# Altium PCB FAB_SA45_DaughterCard.PcbDoc
Units mm, origin at the board's own origin, x right, y up, seen from the top; angles counter-clockwise.
Board outline 50.8 x 50.8 mm, 4 copper layers (L01-Top Layer, L02-Inner Layer, L03-Inner Layer, L04-Bottom Layer), stack 1.571 mm thick; 44 components, 16 nets, 91 pads, 84 vias.
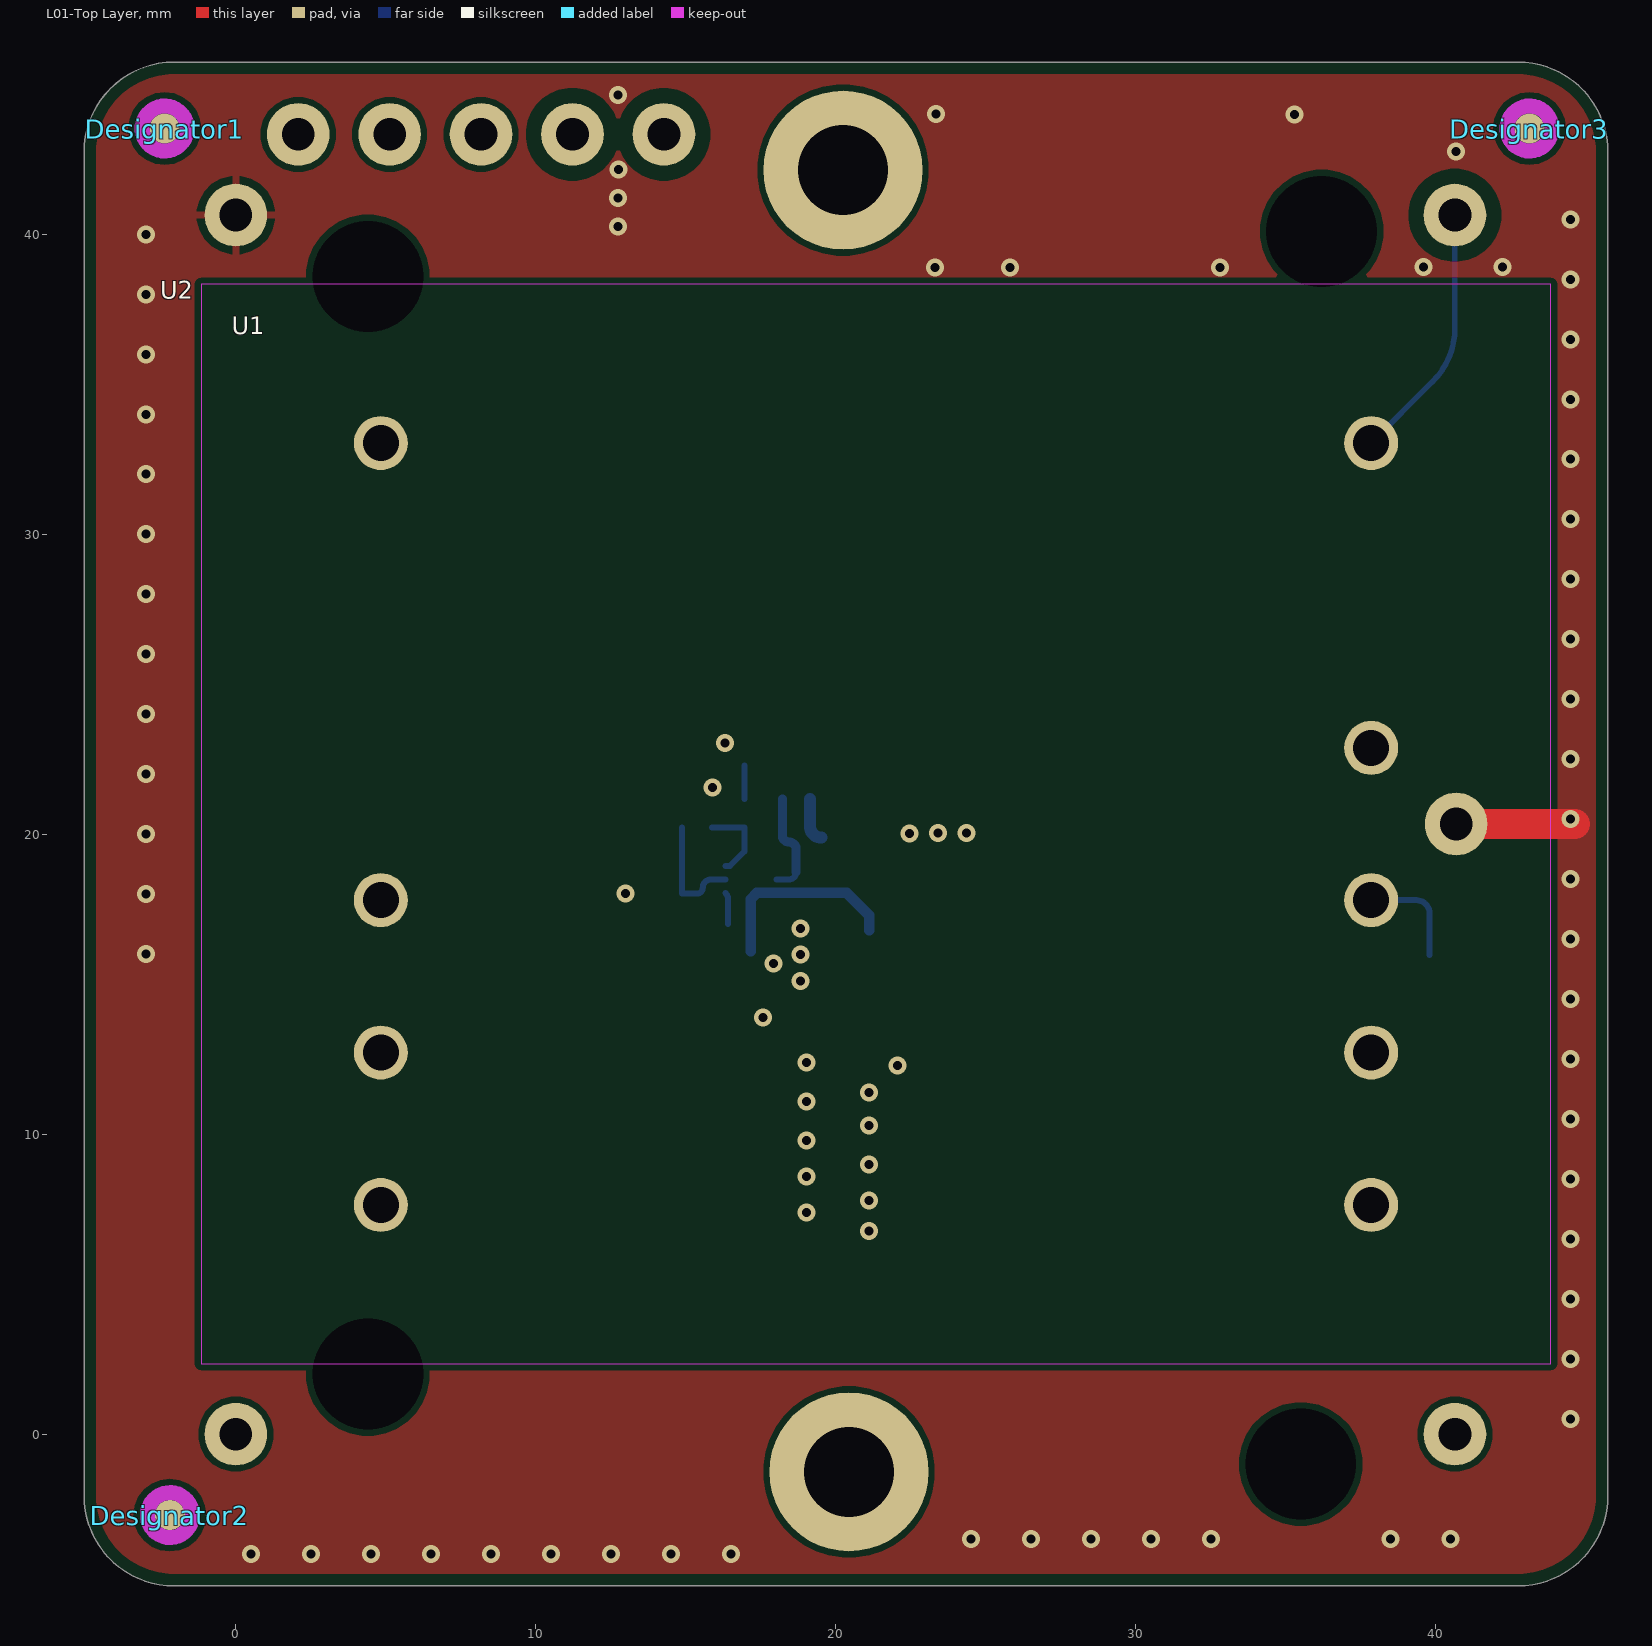
[diagram p0: L01-Top Layer view]
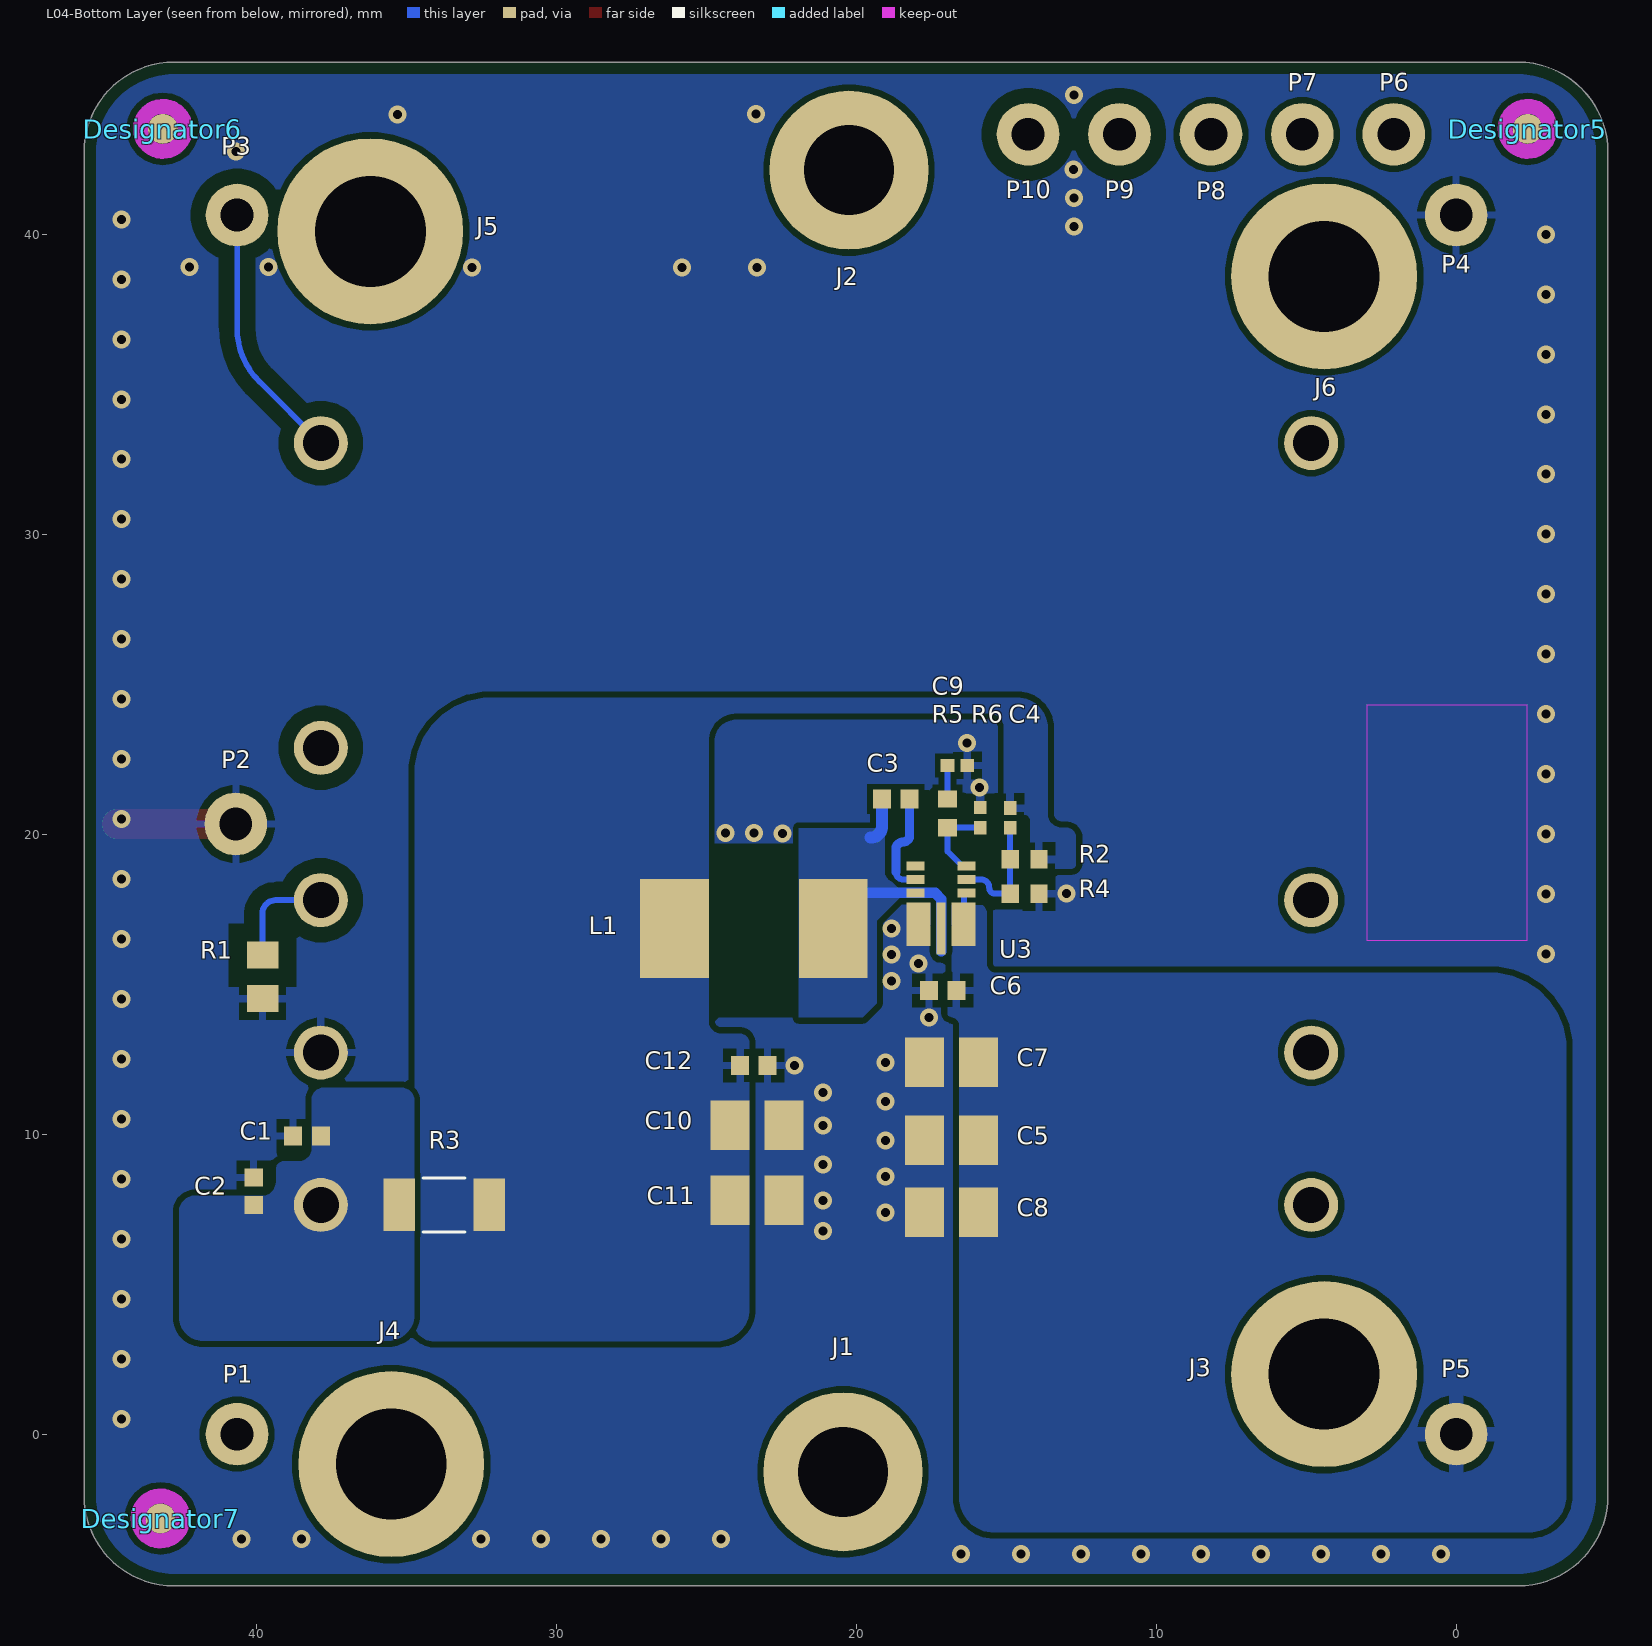
[diagram p1: L04-Bottom Layer view, seen from below]
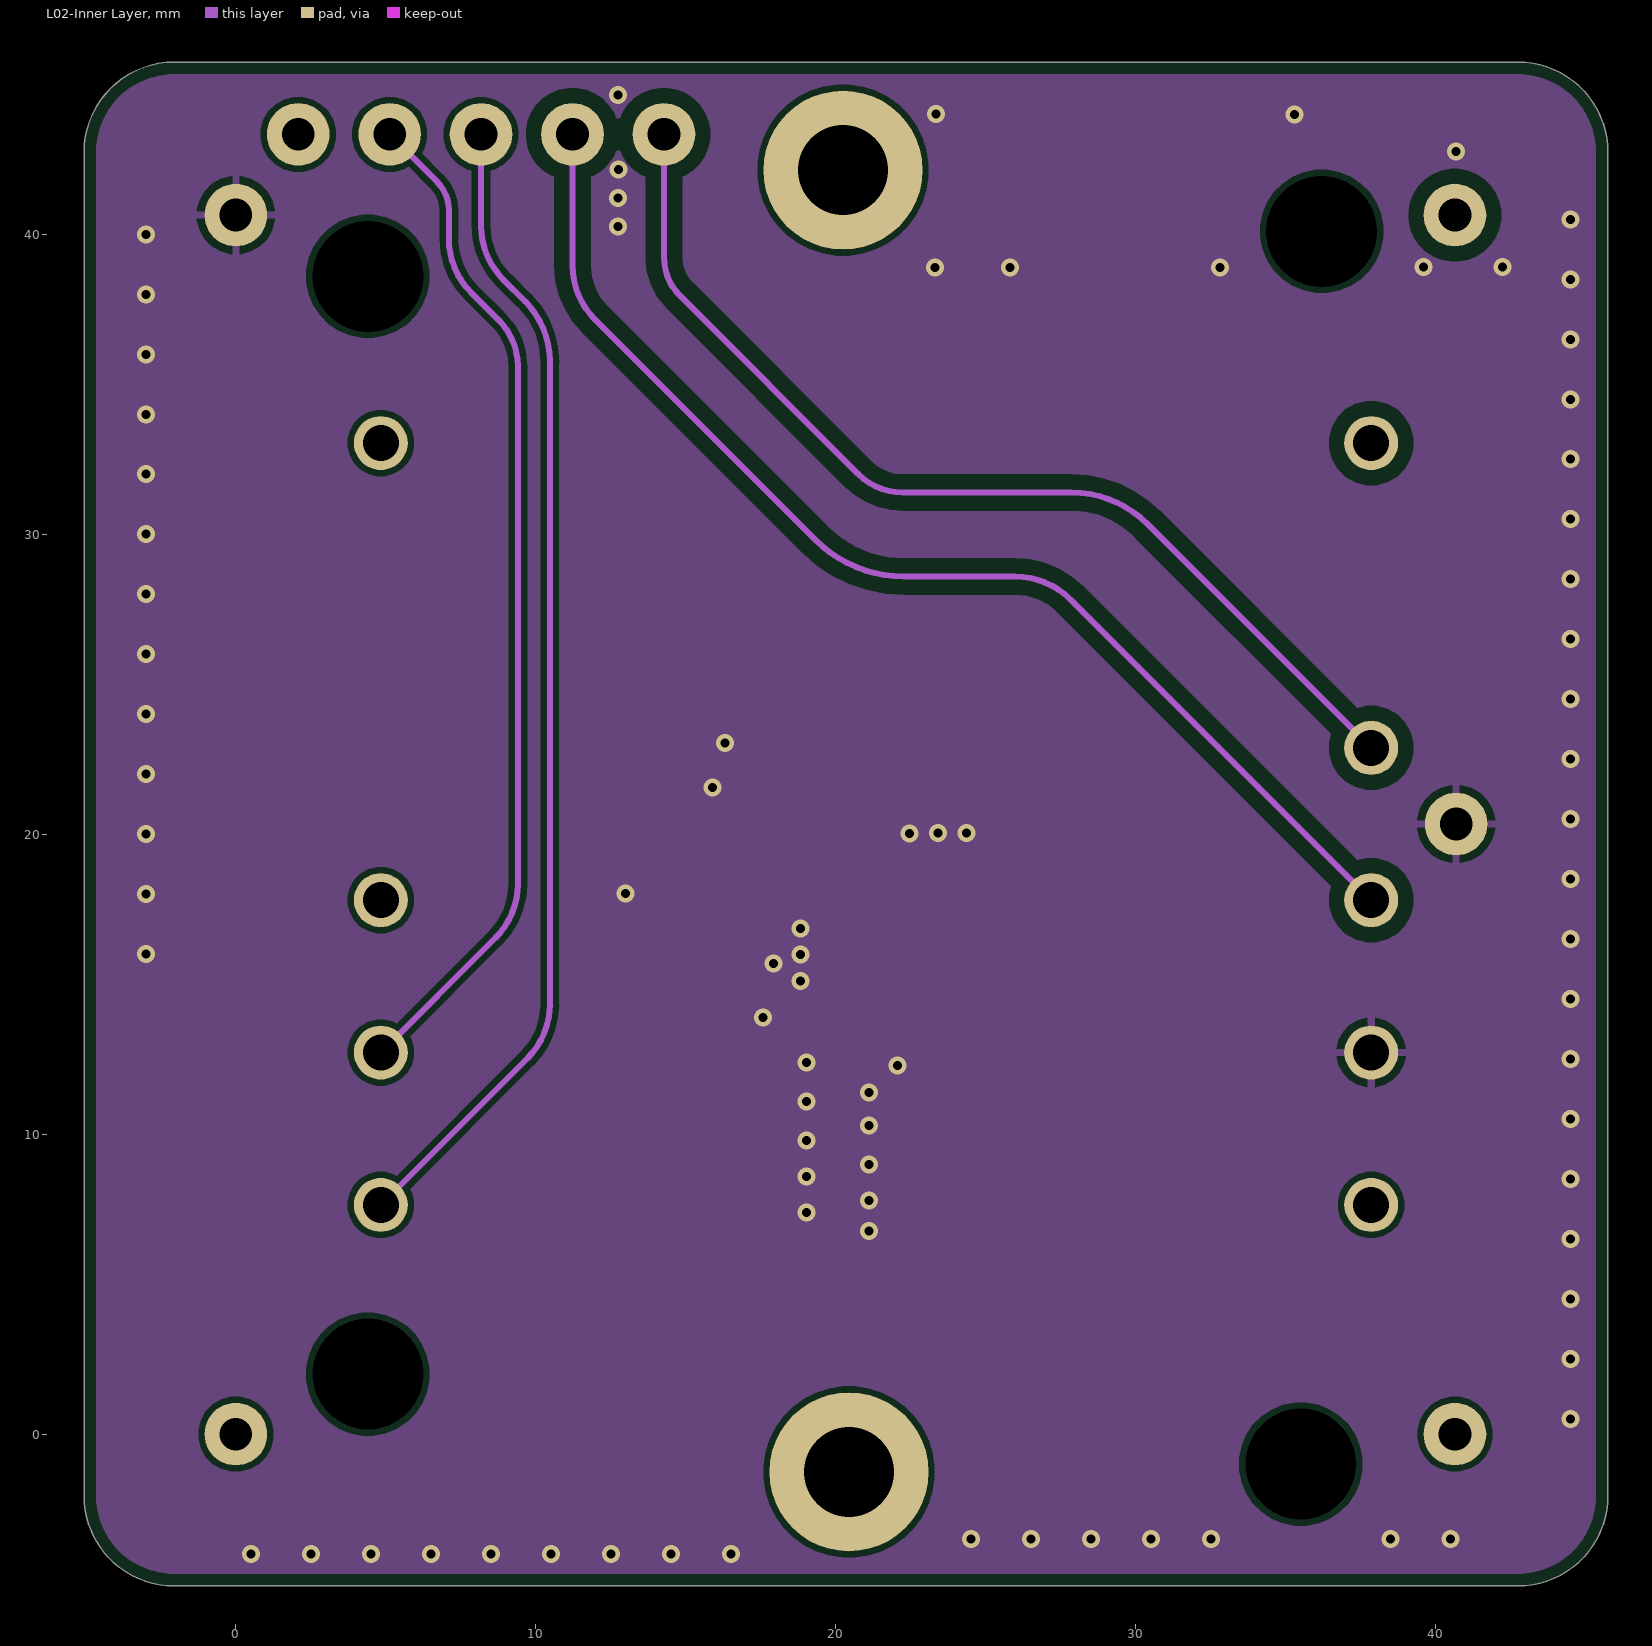
[diagram p2: L02-Inner Layer]
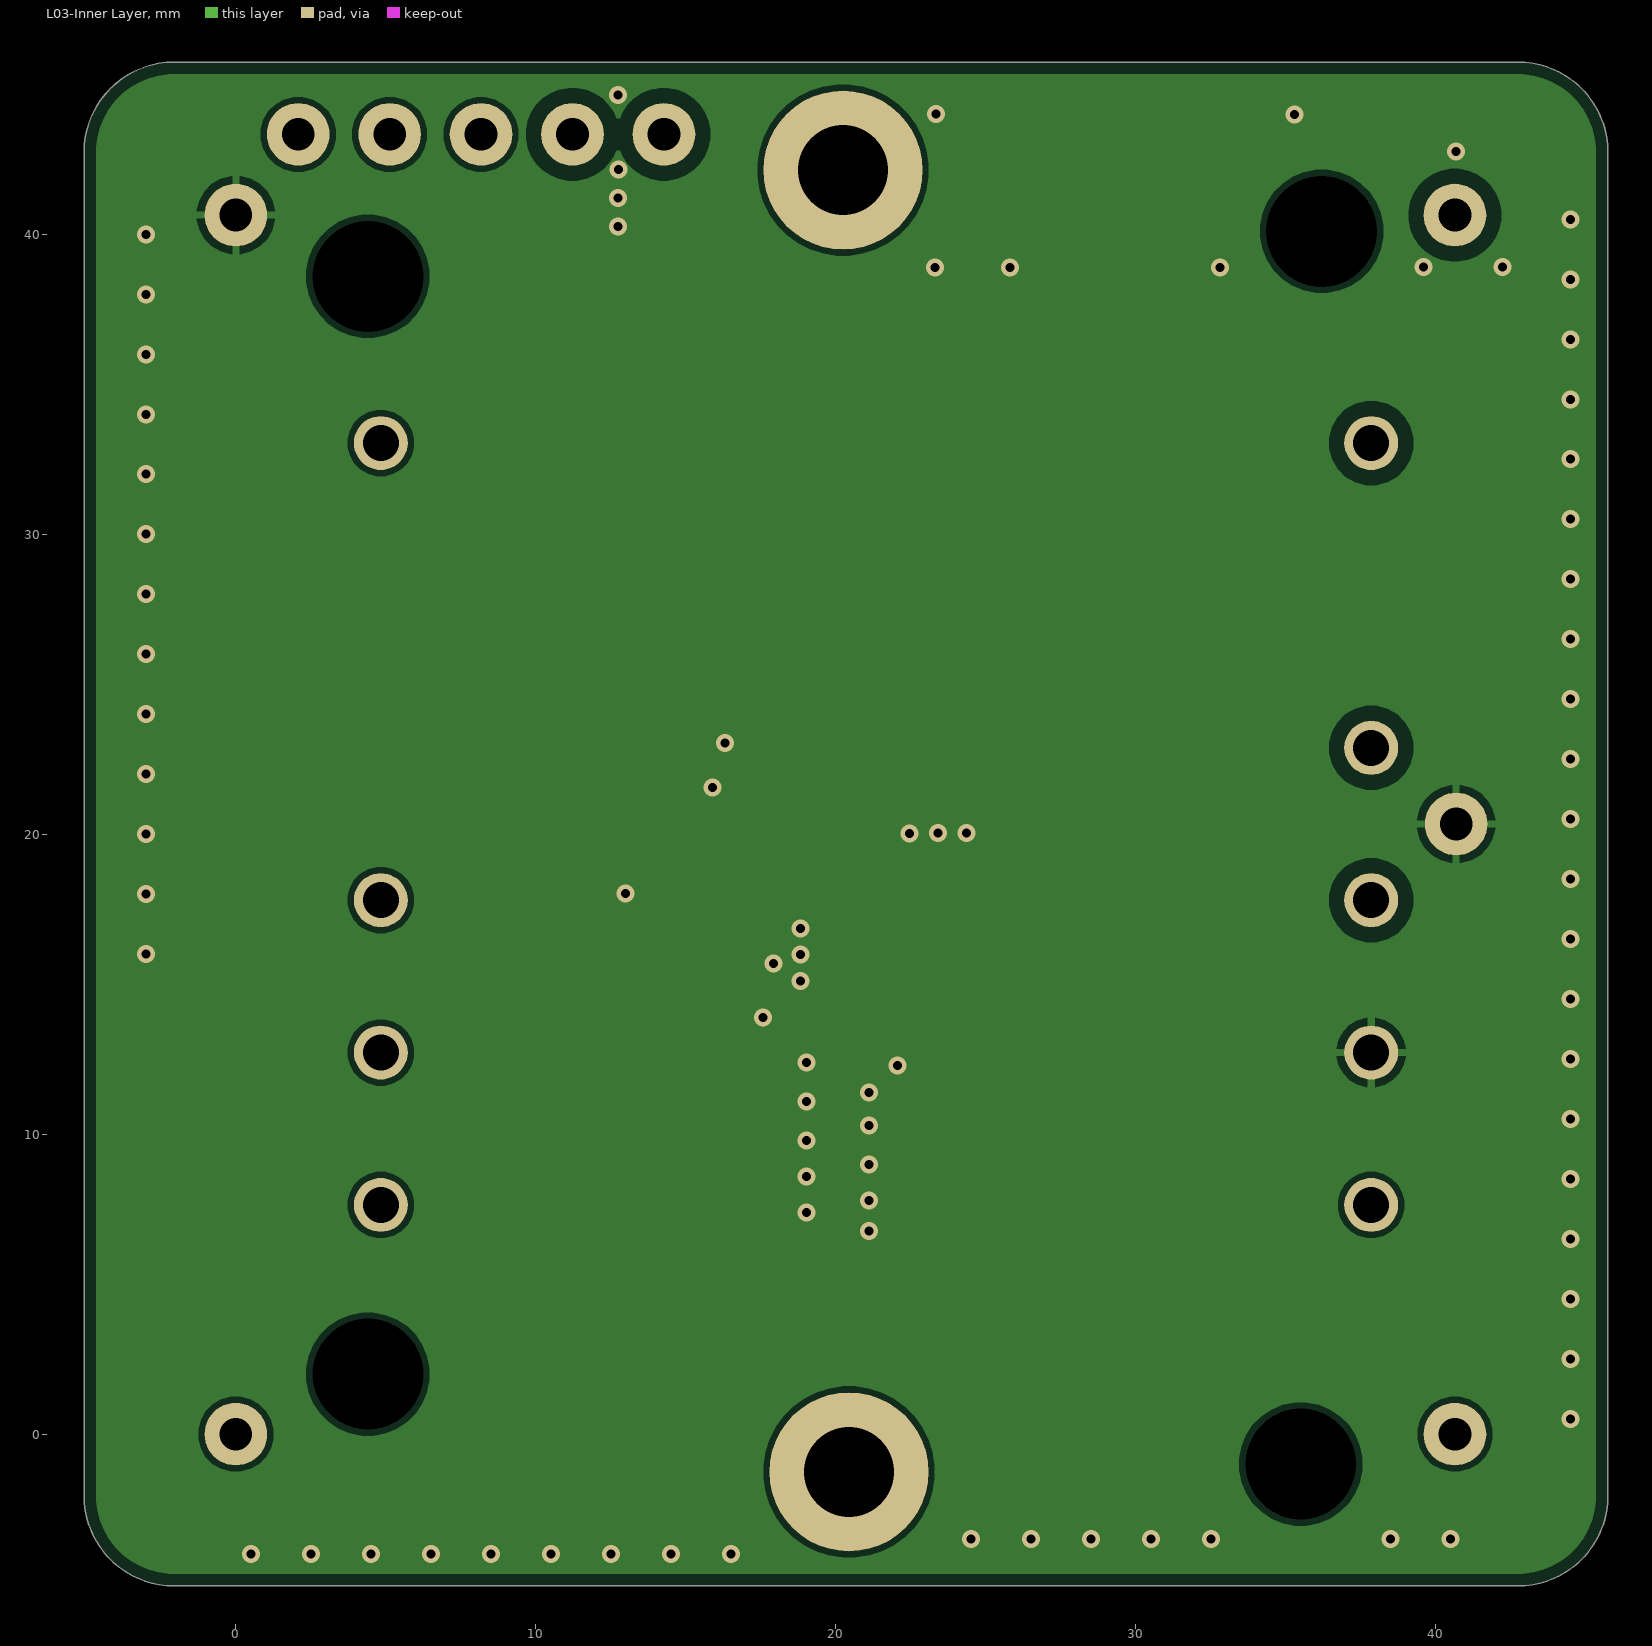
[diagram p3: L03-Inner Layer]
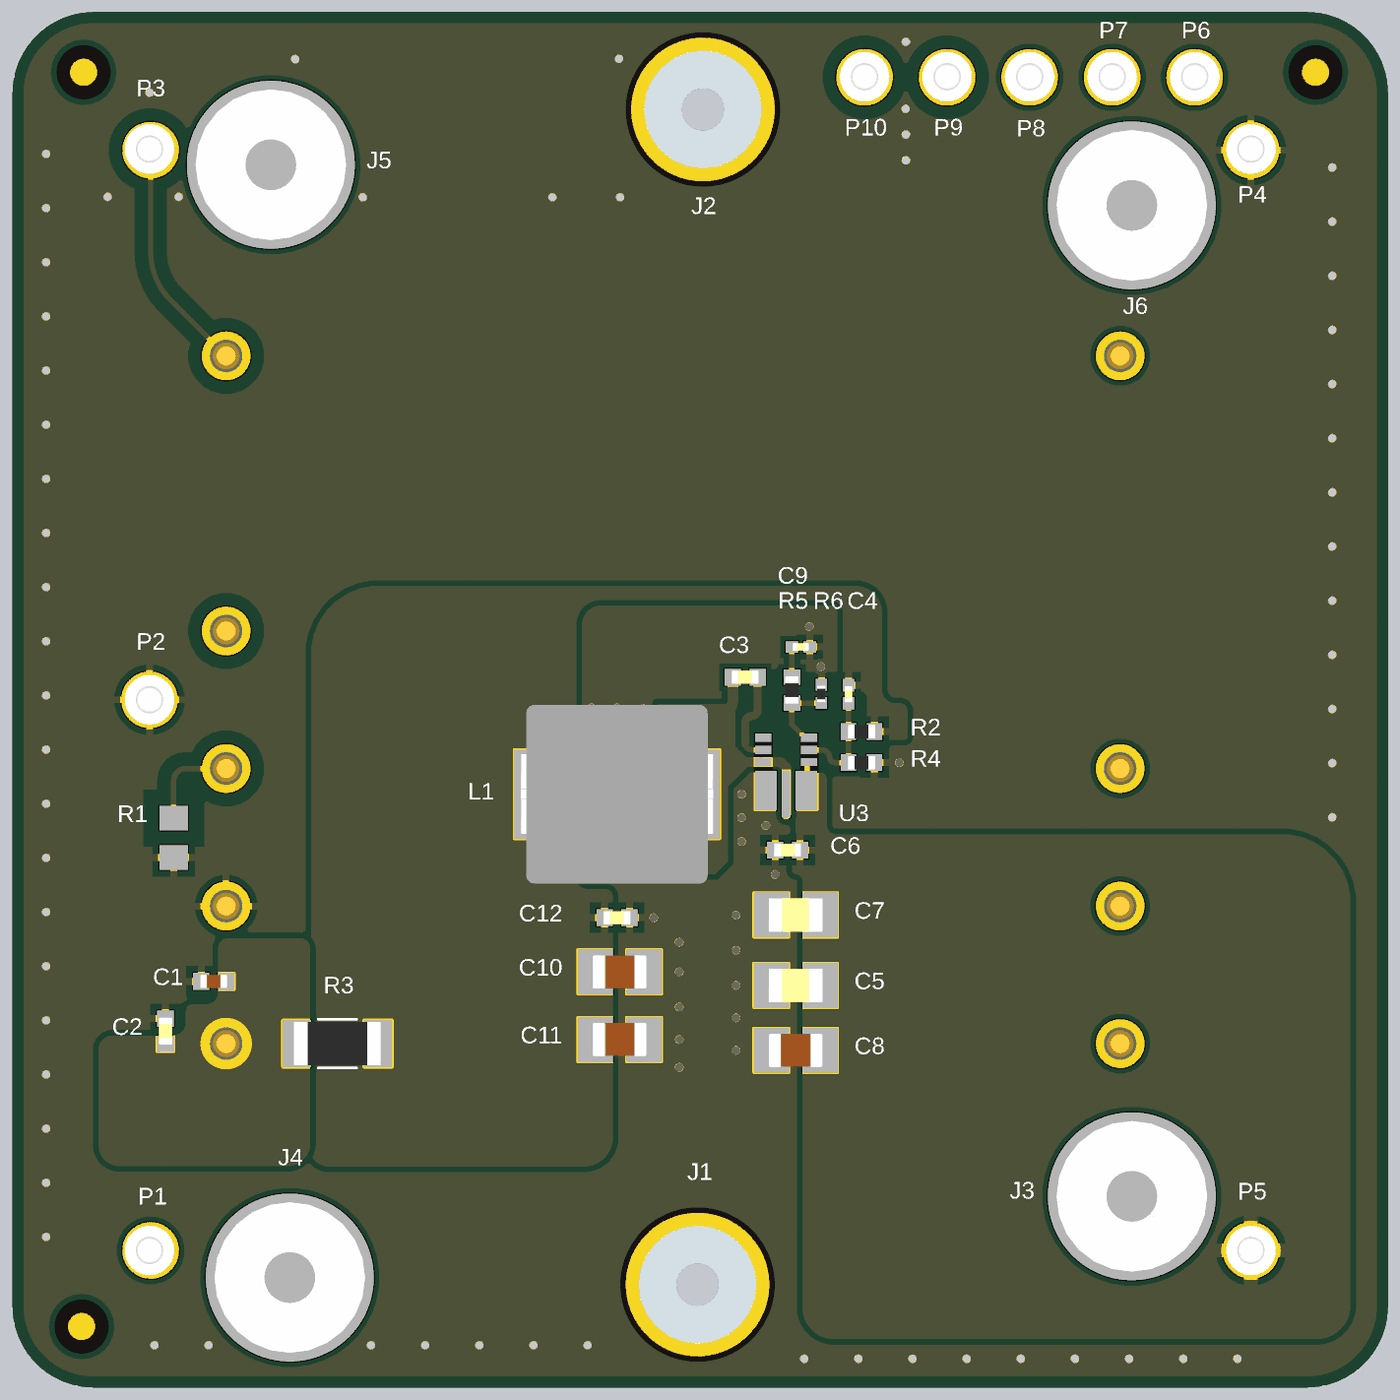
[diagram p4: 3D render of the assembled board from below, using the file's embedded part models]

## Layer stack, top to bottom
Top Solder: solder mask 0.0178, Solder Resist, Dk 3.5
L01-Top Layer: signal copper 0.0711
Dielectric 1: prepreg 0.1174, 2x106, Dk 4.1
L02-Inner Layer: signal copper 0.0356
Dielectric 2: core 1.1227, FR4, Dk 4.2
L03-Inner Layer: signal copper 0.0356
Dielectric 3: prepreg 0.1174, 2x106, Dk 4.1
L04-Bottom Layer: signal copper 0.0711
Bottom Solder: solder mask 0.0178, Solder Resist, Dk 3.5

## Board outline
-5.06,-2.06 -5.06,42.74 cw(c-2.06,42.74) -2.06,45.74 -2.16,45.74 42.74,45.74 cw(c42.74,42.74) 45.74,42.74 45.74,-2.06 cw(c42.74,-2.06) 42.74,-5.06 -2.06,-5.06 cw(c-2.06,-2.06)

## Design rules (kind name [scope] priority, off if disabled: settings)
AcuteAngle [All] p1: minimum=6.00000000000000E+0001 checktracksonly=FALSE
BoardOutlineClearance [All] p1: gap=0.4 ignorepadtopadclearanceinfootprint=FALSE
Clearance "Small Pitch" [WithinRoom('Small_Pitch')] p1: gap=0.1 ignorepadtopadclearanceinfootprint=FALSE
Clearance PPS [InNet('1PPS_IN')or InNet('1PPS_out') or InNet('RF_OUTPUT')] p2: gap=0.2 ignorepadtopadclearanceinfootprint=FALSE except(0.5: Arc-Fill Arc-Poly Arc-Region Track-Fill Track-Poly Track-Region THPad-Fill THPad-Poly THPad-Region; 0.6: SMDPad-Fill SMDPad-Poly SMDPad-Region)
Clearance [All] p3: gap=0.2 ignorepadtopadclearanceinfootprint=FALSE
ComponentClearance OSC [InComponent('U1') or InComponent('U2')] p1: gap=0 collisioncheckmode=3 verticalgap=0 showdistances=FALSE
ComponentClearance [All] p2: gap=0.4 collisioncheckmode=3 verticalgap=4 showdistances=FALSE
DiffPairsRouting 90_Ohm_L1andL4 [InDifferentialPairClass('90_Ohm')] p1: maxlimit=0.254 minlimit=0.14 mostfreqgap=0.254 toplayer_maxgap=0.14 toplayer_prefgap=0.14 toplayer_minwidth=0.114 toplayer_maxwidth=0.114 toplayer_prefwidth=0.114 midlayer1_mingap=0.254 midlayer1_minwidth=0.381 midlayer1_maxwidth=0.381 midlayer1_prefwidth=0.381 midlayer2_mingap=0.254 midlayer2_minwidth=0.381 midlayer2_maxwidth=0.381 midlayer2_prefwidth=0.381 bottomlayer_maxgap=0.14 bottomlayer_prefgap=0.14 bottomlayer_minwidth=0.114 bottomlayer_maxwidth=0.114 bottomlayer_prefwidth=0.114 maxuncoupledlength=5.08
DiffPairsRouting 100_Ohm_L1andL4 [InDifferentialPairClass('100_Ohm')] p2: maxlimit=0.254 minlimit=0.241 mostfreqgap=0.254 toplayer_maxgap=0.241 toplayer_prefgap=0.241 toplayer_minwidth=0.114 toplayer_maxwidth=0.114 toplayer_prefwidth=0.114 midlayer1_mingap=0.254 midlayer1_minwidth=0.381 midlayer1_maxwidth=0.381 midlayer1_prefwidth=0.381 midlayer2_mingap=0.254 midlayer2_minwidth=0.381 midlayer2_maxwidth=0.381 midlayer2_prefwidth=0.381 bottomlayer_maxgap=0.241 bottomlayer_prefgap=0.241 bottomlayer_minwidth=0.114 bottomlayer_maxwidth=0.114 bottomlayer_prefwidth=0.114 maxuncoupledlength=5.08
DiffPairsRouting 100_Ohm_Default [All] p3: maxlimit=0.254 minlimit=0.241 mostfreqgap=0.254 toplayer_maxgap=0.241 toplayer_prefgap=0.241 toplayer_minwidth=0.114 toplayer_maxwidth=0.114 toplayer_prefwidth=0.114 midlayer1_mingap=0.254 midlayer1_minwidth=0.381 midlayer1_maxwidth=0.381 midlayer1_prefwidth=0.381 midlayer2_mingap=0.254 midlayer2_minwidth=0.381 midlayer2_maxwidth=0.381 midlayer2_prefwidth=0.381 bottomlayer_maxgap=0.241 bottomlayer_prefgap=0.241 bottomlayer_minwidth=0.114 bottomlayer_maxwidth=0.114 bottomlayer_prefwidth=0.114 maxuncoupledlength=5.08
HoleSize [All] p1: absolutevalues=TRUE maxlimit=5 minlimit=0.15 maxpercent=80.000 minpercent=20.000
HoleToHoleClearance HoleToHole_OSC [InComponent('U1') or InComponent('U2')] p1: gap=0 allowstackedmicrovias=TRUE
HoleToHoleClearance [All] p2: gap=0.3 allowstackedmicrovias=TRUE
MatchedLengths [InDifferentialPairClass('All Differential Pairs')] p1: tolerance=0.025 checknetsindiffpair=TRUE checkdiffpairvsdiffpair=FALSE checkxsignals=FALSE checkothers=FALSE
MinimumSolderMaskSliver [All] p1: minsoldermaskwidth=0.1 // 0.076mm for Green Soldermask, 0.1 for other color soldermask
PlaneClearance [All] p1: clearance=0.254
PlaneConnect [All] p1: pad.planeconnectstyle=Relief pad.reliefexpansion=0.508 pad.reliefentries=4 pad.reliefconductorwidth=0.254 pad.reliefairgap=0.254 via.planeconnectstyle=Direct via.reliefexpansion=0.508 via.reliefentries=4 via.reliefconductorwidth=0.254 via.reliefairgap=0.254
PolygonConnect [All] p1: thpad.connectstyle=Relief thpad.reliefconductorwidth=0.254 thpad.reliefentries=4 thpad.polygonreliefangle="90 Angle" thpad.airgapwidth=0.254 smdpad.connectstyle=Relief smdpad.reliefconductorwidth=0.254 smdpad.reliefentries=4 smdpad.polygonreliefangle="90 Angle" smdpad.airgapwidth=0.254 via.connectstyle=Direct via.reliefconductorwidth=0.254 via.reliefentries=4 via.polygonreliefangle="90 Angle" via.airgapwidth=0.254
RoomDefinition Small_Pitch [All] p1: confinementstyle=ConfineIn formatcopy=TRUE lockcomponents=FALSE outline 16.015,19.09 16.015,16.265 18.315,16.265 18.315,17.715 19.14,17.715 19.14,19.09
RoomDefinition SCH_SA45_DaughterCard [InComponentClass('SCH_SA45_DaughterCard')] p2: confinementstyle=ConfineIn formatcopy=TRUE lockcomponents=FALSE outline -62.06,-48.56 174.34,-48.56 174.34,71.64 -62.06,71.64
RoutingCorners [All] p1: cornerstyle=45-Degree minsetback=2.5 maxsetback=2.5
RoutingVias [All] p1: holewidth=0.2 width=0.4 viastyle="Through Hole" minholewidth=0.15 minwidth=0.35 maxholewidth=0.3 maxwidth=0.6
SilkToSilkClearance [All] p1: silktosilkclearance=0.1
SilkToSolderMaskClearance [IsPad] p1: minsilkscreentomaskgap=0.2 clearancetoexposedcopper=TRUE
SolderMaskExpansion [All] p1: expansion=0.05 istentingtop=FALSE
UnRoutedNet [All] p1: checkbadconnections=TRUE
Width 50SE [InNetClass('50SE')] p1: maxlimit=1 minlimit=0.1 preferedwidth=0.2 toplayer_minwidth=0.185 toplayer_maxwidth=0.185 toplayer_prefwidth=0.185 bottomlayer_minwidth=0.185 bottomlayer_maxwidth=0.185 bottomlayer_prefwidth=0.185 minimp=50.000000 maximp=50.000000 favimp=50.000000 // This is the defualt width rule for anything that does not have a specific width rule.
Width [All] p2: maxlimit=1 minlimit=0.1 preferedwidth=0.2
19 further rules are at their usual default settings.

## Classes and differential pairs
net class 50SE: RF_OUTPUT
component class SCH_SA45_DaughterCard: C1 C2 C3 C4 C5 C6 C7 C8 C9 C10 C11 C12 J1 J2 J3 J4 J5 J6 J? L1 P1 P2 P3 P4 P5 P6 P7 P8 P9 P10 P? R1 R2 R3 R4 R5 R6 U1 U2 U3

## Components (designator, comment, footprint, x,y, rotation, side; value= is the part's Value field where it differs from the comment)
C1 "Murata_GRM155R6YA105KE11D" CAPC1005X061N 38.31,9.94 r0 bottom
C2 "Murata_GRM155R61H104KE14D" CAPC1005X055N 40.09,8.1 r90 bottom
C3 "Murata_GRM155R61H104KE14D" CAPC1005X055N 18.68,21.175 r0 bottom
C4 "Murata_GRM0335C1E330JA01D" CAPC0603X033N 14.865,20.545 r270 bottom
C5 "Murata_GRM21BR6YA106KE43L" CAPC2013X145N 16.815,9.79 r0 bottom
C6 "Murata_GRM155R61H104KE14D" CAPC1005X055N 17.115,14.79 r0 bottom
C7 "Murata_GRM21BR6YA106KE43L" CAPC2013X145N 16.815,12.39 r0 bottom
C8 "Murata_GRM21BR61A226ME51L" CAPC2013X140N 16.815,7.39 r0 bottom
C9 "Murata_GRM033R61A332KA01D" CAPC0603X033N 16.625,22.29 r180 bottom
C10 "Murata_GRM21BR61A226ME51L" CAPC2013X140N 23.315,10.29 r180 bottom
C11 "Murata_GRM21BR61A226ME51L" CAPC2013X140N 23.315,7.79 r180 bottom
C12 "Murata_GRM155R61H104KE14D" CAPC1005X055N 23.415,12.29 r180 bottom
Designator1 "Comment" FID_1p0mm -2.375,43.525 r0 top
Designator2 "Comment" FID_1p0mm -2.2,-2.7 r0 top
Designator3 "Comment" FID_1p0mm 43.125,43.525 r0 top
Designator5 "Comment" FID_1p0mm -2.385,43.515 r180 bottom
Designator6 "Comment" FID_1p0mm 43.115,43.515 r180 bottom
Designator7 "Comment" FID_1p0mm 43.19,-2.81 r180 bottom
J1 "Wurth_9774040243R" TH000V_300DIAx400_001mt_9774040243R 20.44,-1.26 r180 bottom locked
J2 "Wurth_9774040243R" TH000V_300DIAx400_001mt_9774040243R 20.24,42.14 r180 bottom locked
J3 "Keystone_4871" Keystone_4871 4.4,2 r180 bottom locked
J4 "Keystone_4871" Keystone_4871 35.5,-1 r180 bottom locked
J5 "Keystone_4871" Keystone_4871 36.2,40.1 r180 bottom locked
J6 "Keystone_4871" Keystone_4871 4.4,38.6 r180 bottom locked
L1 "4.7uH" Eaton_HCM0703-4R7-R 23.415,16.853 r0 bottom
P1 "Mill-Max_8600-0-05-80-00-00-03-0" TH001V_109DIA_000mt_8600-0#1 40.68,0 r180 bottom
P2 "Mill-Max_8600-0-05-80-00-00-03-0" TH001V_109DIA_000mt_8600-0#2 40.68,20.34 r180 bottom
P3 "Mill-Max_8600-0-05-80-00-00-03-0" TH001V_109DIA_000mt_8600-0#3 40.68,40.68 r180 bottom
P4 "Mill-Max_8600-0-05-80-00-00-03-0" TH001V_109DIA_000mt_8600-0#4 0,40.68 r180 bottom
P5 "Mill-Max_8600-0-05-80-00-00-03-0" TH001V_109DIA_000mt_8600-0#2 0,0 r180 bottom
P6 "Mill-Max_8600-0-05-80-00-00-03-0" TH001V_109DIA_000mt_8600-0#5 2.078,43.35 r180 bottom
P7 "Mill-Max_8600-0-05-80-00-00-03-0" TH001V_109DIA_000mt_8600-0#5 5.126,43.35 r180 bottom
P8 "Mill-Max_8600-0-05-80-00-00-03-0" TH001V_109DIA_000mt_8600-0#5 8.174,43.35 r180 bottom
P9 "Mill-Max_8600-0-05-80-00-00-03-0" TH001V_109DIA_000mt_8600-0#5 11.222,43.35 r180 bottom
P10 "Mill-Max_8600-0-05-80-00-00-03-0" TH001V_109DIA_000mt_8600-0#5 14.27,43.35 r180 bottom
R1 "100k" RESC1608X55X30ML15T15 39.79,15.24 r90 bottom
R2 "Yageo_RC0402FR-0791KL" RESC1005X040N 14.385,19.165 r0 bottom
R3 "Yageo_RC1206JR-070RL" RESC3216X070N 33.74,7.64 r0 bottom
R4 "Yageo_RC0402FR-0730KL" RESC1005X040N 14.385,18.015 r180 bottom
R5 "Panasonic_ERJ-2RKF2702X" RESC1005X040N 16.955,20.695 r90 bottom
R6 "Yageo_RC0201JR-070RL" RESC0603X026N 15.865,20.555 r90 bottom
U1 "Microchip_SA45" Microchip_SA45 21.34,20.34 r180 top locked
U2 "IQD_ICPT-1" IQD_ICPT-1 21.34,20.34 r180 top locked
U3 "DiodesInc_AP63356QZV-7" DiodesInc_AP63356QZV-7 17.165,17.965 r0 bottom

## Footprints (in the part's own frame and the unit in brackets; to place one, negate y for a bottom-side part, rotate by r counter-clockwise, add the part's x,y. Pads: shape width x height; smd on the part's side, far side on the other; paste and mask are expansions set on the pad)
CAPC0603X033N [mm] "Chip Capacitor, Body 0.6x0.3mm, Height 0.33mm"
  rect 0.46x0.42 smd paste+0 mask+0.05: 1(-0.33,0) 2(0.33,0)
  body extent -0.3,-0.15 0.3,0.15, height 0.33
CAPC1005X055N [mm] "Chip Capacitor, Body 1.0x0.5mm, Hieght 0.55mm"
  rect 0.6x0.62 smd paste+0 mask+0.05: 1(-0.46,0) 2(0.46,0)
  body extent -0.5,-0.25 0.5,0.25, height 0.55
CAPC1005X061N [mm] "Chip Capacitor, Body 1.0x0.5mm, Hieght 0.61mm"
  rect 0.6x0.62 smd paste+0 mask+0.05: 1(-0.46,0) 2(0.46,0)
  body extent -0.5,-0.25 0.5,0.25, height 0.56
CAPC2013X140N [mm] "Chip Capacitor, Body 2.0x1.3mm, Height 1.40mm"
  rect 1.3x1.65 smd paste+0 mask+0.05: 1(-0.9,0) 2(0.9,0)
  body extent -1,-0.62 1,0.63, height 1.4
CAPC2013X145N [mm] "Chip Capacitor, Body 2.0x1.3mm, Height 1.45mm"
  rect 1.3x1.65 smd paste+0 mask+0.05: 1(-0.9,0) 2(0.9,0)
  body extent -1,-0.62 1,0.63, height 1.45
DiodesInc_AP63356QZV-7 [mm]
  rect 0.8x1.45 smd paste+0 mask+0.05: 1(-0.75,0.975) 8(0.75,0.975)
  rect 0.6x0.3 smd paste+0 mask+0.05: 2(-0.85,-0.075) 3(-0.85,-0.525) 4(-0.85,-0.975) 5(0.85,-0.975) 6(0.85,-0.525) 7(0.85,-0.075)
  rect 0.3x1.725 smd paste+0 mask+0.05: 9(0,1.113)
  body extent -1,-1.13 1,1.87, height 0.85
Eaton_HCM0703-4R7-R [mm]
  rect 2.3x3.3 smd paste+0 mask+0.05: 1(-2.65,0) 2(2.65,0)
  body extent -3.55,-3.3 3.55,3.3, height 3.01
FID_1p0mm [mm] "Fiducial, 1.0mm diameter"
  round 1 smd paste-6 mask+0.5: 1(0,0)
  L01-Top Layer keep-out circle w0.5: c0,0 r0.75
IQD_ICPT-1 [mm]
  round 1.8 hole 1.2: 1(16.51,-12.7) 2(16.51,2.54) 3(16.51,7.62) 4(16.51,12.7) 5(-16.51,12.7) 6(-16.51,7.62) 7(-16.51,2.54) 8(-16.51,-2.54) 9(-16.51,-12.7)
  L01-Top Layer keep-out region: -22.5,18 -22.5,-18 22.5,-18 22.5,18
  body extent -22.5,-18 22.5,18, height 14.51
Keystone_4871 [mm] "Round Standoff Threaded #2-56 Steel 0.063\" (1.60mm) 1/16\""
  round 0 hole 3.7: Hole(0,0)
  round 6.2 smd mask+0.05: MT(0,0)
  body extent -2.78,-2.77 2.78,2.77, height 1.59
Microchip_SA45 [mil]
  round 60 hole 30: 1(650,-500) 4(650,100) 5(650,300) 6(650,500)
  round 61.5 hole 37.87: 7(-650,500) 8(-650,300) 9(-650,100) 10(-650,-100) 12(-650,-500)
  body extent -800,-695 800,695, height 454
RESC0603X026N [mm] "Chip Resistor, Body 0.6x0.3mm, Height 0.26mm"
  rect 0.44x0.42 smd paste+0 mask+0.05: 1(-0.34,0) 2(0.34,0)
  body extent -0.3,-0.15 0.3,0.15, height 0.26
RESC1005X040N [mm] "Chip Resistor, Body 1.0x0.5mm, Hieght 0.40mm"
  rect 0.57x0.62 smd paste+0 mask+0.05: 1(-0.48,0) 2(0.48,0)
  body extent -0.5,-0.25 0.5,0.25, height 0.4
RESC1608X55X30ML15T15 [mm] "Chip Resistor, 2-Leads, Body 1.60x0.80mm, IPC Low Density"
  rect 0.9x1.05 smd: 1(-0.725,0) 2(0.725,0)
  body extent -0.87,-0.48 0.87,0.48, height 0.55
RESC3216X070N [mm] "Chip Resistor, Body 3.2x1.6mm, Height 0.70mm"
  rect 1.05x1.75 smd paste+0 mask+0.05: 1(-1.5,0) 2(1.5,0)
  silkscreen extent -0.7,-0.9 0.7,0.9, body extent -1.6,-0.8 1.6,0.8, height 0.7
TH000V_300DIAx400_001mt_9774040243R [mm] "Spacer, 1 MH Non-Plated, 3.0DIAx4.0mm, 1.4mm tail, 9774040243R"
  round 5.3 hole 3 unplated paste-2539.97 mask+0.2: MT1(0,0)
  body extent -2.17,-2.16 2.17,2.16, height 4
TH001V_109DIA_000mt_8600-0#1 [mm] "Terminal, 1 Pin, 1.09DIA MH, 8600-0"
  round 2.09 hole 1.09 paste-2539.97 mask+0.05: 1(0.04,0)
  body extent -0.91,-0.91 0.91,0.91, height 10.16
TH001V_109DIA_000mt_8600-0#2 [mm] "Terminal, 1 Pin, 1.09DIA MH, 8600-0"
  round 2.09 hole 1.09 paste-2539.97 mask+0.05: 1(0,0)
  body extent -0.91,-0.91 0.91,0.91, height 10.16
TH001V_109DIA_000mt_8600-0#3 [mm] "Terminal, 1 Pin, 1.09DIA MH, 8600-0"
  round 2.09 hole 1.09 paste-2539.97 mask+0.05: 1(0.04,-0.04)
  body extent -0.91,-0.91 0.91,0.91, height 10.16
TH001V_109DIA_000mt_8600-0#4 [mm] "Terminal, 1 Pin, 1.09DIA MH, 8600-0"
  round 2.09 hole 1.09 paste-2539.97 mask+0.05: 1(0,-0.04)
  body extent -0.91,-0.91 0.91,0.91, height 10.16
TH001V_109DIA_000mt_8600-0#5 [mm] "Terminal, 1 Pin, 1.09DIA MH, 8600-0"
  round 2.09 hole 1.09 paste-2539.97 mask+0.05: 1(0,-0.02)
  body extent -0.91,-0.91 0.91,0.91, height 10.16

## Part data
C1: library part CAP-CMP-00372-3, "CAP, CER, X5R, 1UF, 10%, 35V, 0402, 0.55MM T", Capacitance=1µF, Case/Package="0402 (1005 Metric)", Manufacturer=Murata, Manufacturer Part Number=GRM155R6YA105KE11D, Max Operating Temperature=85°C, Min Operating Temperature=-55°C, Supplier Part Number 1=490-10019-1-ND, Temperature Coefficient=X5R, Tolerance=±10%, Voltage Rating=35V, Applications="General Purpose", Category="Ceramic Capacitors", Composition=Ceramic, Datasheet URL=https://www.digikey.com/en/products/detail/murata-electronics/GRM155R6YA105KE11D/4905162?s=N4IgTCBcDaIOICUCyBGArGhA2AmgQRQAY0BpAURRQBEQBdAXyA, Height="0.024\" (0.60mm)", Mounting Type="Surface Mount, MLCC", Polarization=Non-polar, RoHS=Yes, series=GRM155R6YA, Size / Dimension="0.039\" L x 0.020\" W (1.00mm x 0.50mm)", Supplier 1=Digikey
C2 C3 C6 C12: library part CAP-CMP-00369-3, "CAP, CER, X5R, 0.10UF, 10%, 50V, 0402, 0.55MM T", Capacitance=0.1µF, Case/Package="0402 (1005 Metric)", Manufacturer=Murata, Manufacturer Part Number=GRM155R61H104KE14D, Max Operating Temperature=85°C, Min Operating Temperature=-55°C, Supplier Part Number 1=490-10697-1-ND, Temperature Coefficient=X5R, Tolerance=±10%, Voltage Rating=50V, Applications="General Purpose", Category="Ceramic Capacitors", Composition=Ceramic, Datasheet URL=https://www.digikey.com/en/products/detail/murata-electronics/GRM155R61H104KE14D/4905152?s=N4IgTCBcDaIOICUCyBGArGhA2FAJFADACwDSAoikQCIgC6AvkA, Height="0.022\" (0.55mm)", Mounting Type="Surface Mount, MLCC", Polarization=Non-polar, RoHS=Yes, series=GRM155R61H, Size / Dimension="0.039\" L x 0.020\" W (1.00mm x 0.50mm)", Supplier 1=Digikey
C4: library part CAP-CMP-00129-3, "CAP, CER, NP0, 33PF, 5%, 25V, 0201, 0.33MM T", Capacitance=33pF, Case/Package="0201 (0603 Metric)", Manufacturer=Murata, Manufacturer Part Number=GRM0335C1E330JA01D, Max Operating Temperature=125°C, Min Operating Temperature=-55°C, Supplier Part Number 1=490-10678-1-ND, Temperature Coefficient="C0G, NP0", Tolerance=±5%, Voltage Rating=25V, Applications="General Purpose", Category="Ceramic Capacitors", Composition=Ceramic, Datasheet URL=https://www.digikey.com/en/products/detail/murata-electronics/GRM0335C1E330JA01D/4358214?s=N4IgTCBcDaIOICUCyAGAzGgrAYQIwFEMUApAQRVwBEQBdAXyA, Height="0.013\" (0.33mm)", Mounting Type="Surface Mount, MLCC", Polarization=Non-polar, RoHS=Yes, series=GRM0335C1E, Size / Dimension="0.024\" L x 0.012\" W (0.60mm x 0.30mm)", Supplier 1=Digikey
C5 C7: library part CAP-CMP-00525-3, "CAP, CER, X5R, 10UF, 10%, 35V, 0805, 1.45MM T", Capacitance=10µF, Case/Package="0805 (2013 Metric)", Manufacturer=Murata, Manufacturer Part Number=GRM21BR6YA106KE43L, Max Operating Temperature=85°C, Min Operating Temperature=-55°C, Supplier Part Number 1=490-10514-1-ND, Temperature Coefficient=X5R, Tolerance=±10%, Voltage Rating=35V, Applications="General Purpose", Category="Ceramic Capacitors", Composition=Ceramic, Datasheet URL=https://www.digikey.com/en/products/detail/murata-electronics/GRM21BR6YA106KE43L/5027598?s=N4IgTCBcDaIOICUCyYCMAhBA2AmgQVQAYsBpAUQBYBmAGRAF0BfIA, Height="0.057\" (1.45mm)", Mounting Type="Surface Mount, MLCC", Polarization=Non-polar, RoHS=Yes, series=GRM21BR6YA, Size / Dimension="0.079\" L x 0.049\" W (2.00mm x 1.25mm)", Supplier 1=Digikey
C8 C10 C11: library part CAP-CMP-00519-3, "CAP, CER, X5R, 22UF, 20%, 10V, 0805, 1.40MM T", Capacitance=22µF, Case/Package="0805 (2013 Metric)", Manufacturer=Murata, Manufacturer Part Number=GRM21BR61A226ME51L, Max Operating Temperature=85°C, Min Operating Temperature=-55°C, Supplier Part Number 1=490-10511-1-ND, Temperature Coefficient=X5R, Tolerance=±20%, Voltage Rating=10V, Applications="General Purpose", Category="Ceramic Capacitors", Composition=Ceramic, Datasheet URL=https://www.digikey.com/en/products/detail/murata-electronics/GRM21BR61A226ME51L/5027595?s=N4IgTCBcDaIOICUCyYCMAhBA2VBBMYWSAogKyoAyIAugL5A, Height="0.055\" (1.40mm)", Mounting Type="Surface Mount, MLCC", Polarization=Non-polar, RoHS=Yes, series=GRM21BR61A, Size / Dimension="0.079\" L x 0.049\" W (2.00mm x 1.25mm)", Supplier 1=Digikey
C9: library part CAP-CMP-00202-3, "CAP, CER, X5R, 3300PF, 10%, 10V, 0201, 0.33MM T", Capacitance=3.3nF, Case/Package="0201 (0603 Metric)", Manufacturer=Murata, Manufacturer Part Number=GRM033R61A332KA01D, Max Operating Temperature=85°C, Min Operating Temperature=-55°C, Supplier Part Number 1=490-3163-1-ND, Temperature Coefficient=X5R, Tolerance=±10%, Voltage Rating=10V, Applications="General Purpose", Composition=Ceramic, Datasheet URL=https://www.digikey.com/en/products/detail/murata-electronics/GRM033R61A332KA01D/702429?s=N4IgTCBcDaIOICUCyAGAzGhA2AjAQQzAGk8UcAREAXQF8g, Height="0.013\" (0.33mm)", Polarization=Non-polar, RoHS=Yes, series=GRM, Size / Dimension="0.024\" L x 0.012\" W (0.60mm x 0.30mm)", Supplier 1=Digikey
J1 J2: library part CON-CMP-00164-1, "STANDOFF, ROUND, M2X0.4 STEEL 4MM, 9774040243R", Manufacturer="Wurth Elektronik", Manufacturer Part Number=9774040243R, Max Operating Temperature=150°C, Min Operating Temperature=-55°C, Supplier Part Number 1=732-7090-1-ND, Category="Board Spacers, Standoffs", Contact Material=Steel, Datasheet URL=https://www.digikey.com/en/products/detail/w%C3%BCrth-elektronik/9774040243R/5320633?s=N4IgTCBcDaIJwHYEBYAMazIMwCUQF0BfIA, Height="0.157\" (4.00mm)", Mounting Type="Through Hole, Vertical", RoHS=Yes, Screw Thread=M2x0.4, series=WA-SMSI, Supplier 1=Digikey, System=connector, Type="Round Standoff"
J3 J4 J5 J6: Manufacturer="Keystone Electronics", Manufacturer Part Number=4871, componentlink1description=Datasheet, System=connector
L1: library part Inductor_Eaton, Manufacturer=Eaton, Manufacturer Part Number=HCM0703-4R7-R
P1 P2 P3 P4 P5 P6 P7 P8 P9 P10: library part CON-CMP-00162-1, "CONN, PC PIN, PRESS-FIT, 10.16MM LENGTH, TIN, TH", Manufacturer="Mill-Max Manufacturing Corp.", Manufacturer Part Number=8600-0-05-80-00-00-03-0, Max Operating Temperature=125°C, Min Operating Temperature=-55°C, Supplier Part Number 1=8600-0-05-80-00-00-03-0-ND, Category="Terminals - PC Pin, Single Post Connectors", Contact Finish=Tin, Contact Material="Brass Alloy", Datasheet URL=https://www.digikey.com/en/products/detail/mill-max-manufacturing-corp/8600-0-05-80-00-00-03-0/7775333?s=N4IgTCBcDaIBwDYAMSC0akFZVw39AzOiALoC%2BQA, Flange Diameter="0.072\" (1.83mm)", Insulation=Non-Insulated, Length - Above Flange="0.364\" (9.25mm)", Length - Below Flange="0.060\" (1.52mm)", Length - Overall="0.460\" (11.68mm)", Mounting Hole Diameter="0.043\" (1.09mm)", Mounting Type="Through Hole, Vertical", Pin Size - Above Flange="0.040\" (1.02mm) Dia", Pin Size - Below Flange="0.035\" (0.89mm) Square", RoHS=Yes, Rows=1, series=8600, Signal Pins=1, Supplier 1=Digikey, System=connector, Terminal Style="Single End", Terminal Type="PC Pin", Termination="Press-Fit, Square"
R1: library part CMP-2000-00182-1, Manufacturer=Panasonic, Manufacturer Part Number=ERJ-3EKF1003V
R2: library part RES-CMP-00859-1, "RES SMD 91K OHM 1% 1/16W 0402", Case/Package="0402 (1005 Metric)", Manufacturer=Yageo, Manufacturer Part Number=RC0402FR-0791KL, Max Operating Temperature=155°C, Min Operating Temperature=-55°C, Power (Watts)=62.5mW, Resistance=91k, Supplier Part Number 1=311-91.0KLRCT-ND, Temperature Coefficient=±100ppm/°C, Tolerance=±1%, Category="Chip Resistor - Surface Mount", Composition="Thick Film", Datasheet URL=https://www.yageo.com/upload/media/product/productsearch/datasheet/rchip/PYu-RC_Group_51_RoHS_L_12.pdf, Height="0.016\" (0.40mm)", series=RC_L, Size / Dimension="0.039\" L x 0.020\" W (1.00mm x 0.50mm)", Supplier 1=Digi-Key
R3: library part RES-CMP-00805-3, "RES, 0 OHM, 2A, 1/4W, 1206", Case/Package="1206 (3216 Metric)", Manufacturer=Yageo, Manufacturer Part Number=RC1206JR-070RL, Max Operating Temperature=155°C, Min Operating Temperature=-55°C, Power (Watts)=250mW, Resistance=0, Supplier Part Number 1=311-0.0ERCT-ND, Tolerance=Jumper, Category="Chip Resistor - Surface Mount", Composition="Thick Film", Datasheet URL=https://www.digikey.com/en/products/detail/yageo/RC1206JR-070RL/729184?s=N4IgTCBcDaIEoGECMYAMA2AUnAtKg7KnADIgC6AvkA, Features="Moisture Resistant", Height="0.026\" (0.65mm)", RoHS=Yes, series=RC_L, Size / Dimension="0.122\" L x 0.063\" W (3.10mm x 1.60mm)", Supplier 1=Digikey
R4: library part RES-CMP-00517-3, "RES SMD 30K OHM 1% 1/16W 0402", Case/Package="0402 (1005 Metric)", Manufacturer=Yageo, Manufacturer Part Number=RC0402FR-0730KL, Max Operating Temperature=155°C, Min Operating Temperature=-55°C, Power (Watts)=62.5mW, Resistance=30k, Supplier Part Number 1=311-30.0KLRCT-ND, Temperature Coefficient=±100ppm/°C, Tolerance=±1%, Category="Chip Resistor - Surface Mount", Composition="Thick Film", Datasheet URL=https://www.yageo.com/upload/media/product/productsearch/datasheet/rchip/PYu-RC_Group_51_RoHS_L_11.pdf, Height="0.016\" (0.40mm)", series=RC_L, Size / Dimension="0.039\" L x 0.020\" W (1.00mm x 0.50mm)", Supplier 1=Digi-Key
R5: library part RES-CMP-00346-3, "RES, 27K OHM, 1%, 1/10W, 100PPM/C, 0402", Case/Package="0402 (1005 Metric)", Manufacturer=Panasonic, Manufacturer Part Number=ERJ-2RKF2702X, Max Operating Temperature=155°C, Min Operating Temperature=-55°C, Power (Watts)=100mW, Ratings=AEC-Q200, Resistance=27k, Supplier Part Number 1=P27.0KLCT-ND, Temperature Coefficient=±100ppm/°C, Tolerance=±1%, Category="Chip Resistor - Surface Mount", Composition="Thick Film", Datasheet URL=https://www.digikey.com/en/products/detail/panasonic-electronic-components/ERJ-2RKF2702X/1746175?s=N4IgTCBcDaIKICUBSBaMCDSAxMB2ADGABogC6AvkA, Features="Automotive AEC-Q200", Height="0.016\" (0.40mm)", RoHS=Yes, series=ERJ-2RK, Size / Dimension="0.039\" L x 0.020\" W (1.00mm x 0.50mm)", Supplier 1=Digikey
R6: library part RES-CMP-00042-3, "RES, 0.0 OHM, 0.5A, 1/20W, 0201", Case/Package="0201 (0603 Metric)", Manufacturer=Yageo, Manufacturer Part Number=RC0201JR-070RL, Power (Watts)=50mW, Resistance=0, Supplier Part Number 1=311-0.0NCT-ND, Tolerance=Jumper, Category="Chip Resistor - Surface Mount", Composition="Thick Film", Datasheet URL=https://www.yageo.com/upload/media/product/productsearch/datasheet/rchip/PYu-RC_Group_51_RoHS_L_11.pdf, Height="0.010\" (0.26mm)", series=RC, Size / Dimension="0.024\" L x 0.012\" W (0.60mm x 0.30mm)", Supplier 1=Digi-Key
U1: Manufacturer=Microchip, Manufacturer Part Number=090-02984-001, componentlink1description=Datasheet, System=connector
U2: Manufacturer=IQD, Manufacturer Part Number=IQD-ICPT-1, componentlink1description=Datasheet
U3: Manufacturer="Diodes Incorporated", Manufacturer Part Number=AP63356QZV-7, componentlink1description=Datasheet, System=connector

## Via types
v1: diameter 0.6, hole 0.3, L01-Top Layer to L04-Bottom Layer, tented both sides, 84 vias

## Nets (pads, with @x,y where several pads share a name; then routed paths per layer and width w, separated by ;. In a path a pad name is that pad's centre, name@x,y a point inside that pad or via, vN(x,y) a via of type N, cw(c..) or ccw(c..) an arc to the next point about the centre after c; other vN are vias at no path point)
1PPS_IN: P9.1 R1.2 U1.9 U2.7 | length 43.6
  L02-Inner Layer w0.2: P9.1@11.222,43.35 11.222,38.96 ccw(c13.762,38.96) 11.966,37.164 19.315,29.815 ccw(c22.272,32.772) 22.27,28.59 25.976,28.59 cw(c25.976,25.972) 27.828,27.822 U1.9
  L04-Bottom Layer w0.2: U1.9 39.355,17.8 cw(c39.355,17.365) 39.79,17.365 R1.2
1PPS_OUT: P10.1 U1.10 U2.8 | length 34.6
  L02-Inner Layer w0.2: 14.27,39.246 ccw(c16.106,39.246) 14.81,37.945 20.752,32.003 ccw(c22.232,33.483) 22.231,31.39 27.864,31.39 cw(c27.864,27.826) 30.384,30.346 U1.10 ; 14.27,39.247 P10.1@14.27,43.35
+3.3V: C4.1 C10.1 C11.1 C12.1 L1.2 R2.1 R3.1
+3.3V_OSC: C1.1 C2.1 R3.2 U1.7 U2.5
+5V: C5.1 C6.1 C7.1 C8.1 P5.1 U3.1 U3.2 | length 1.1
  L04-Bottom Layer w0.2: U3.2 16.344,18.011 cw(c16.202,17.87) 16.402,17.87 U3.1@16.402,17.003
GND: C1.2 C2.2 C5.2 C6.2 C7.2 C8.2 C9.2 C10.2 C11.2 C12.2 P2.1 P4.1 R1.1 R4.2 R6.2 U1.8 U2.6 U3.8 | length 4
  L01-Top Layer w1: P2.1 v1@44.64,20.34
  other v1: 0.5,-4 2.5,-4 4.5,-4 6.5,-4 8.5,-4 10.5,-4 12.5,-4 14.5,-4 16.5,-4 24.5,-3.5 26.5,-3.5 28.5,-3.5 30.5,-3.5 32.5,-3.5 38.5,-3.5 40.5,-3.5 44.5,0.5 44.5,2.5 44.5,4.5 44.5,6.5 21.115,6.765 19.015,7.39 21.115,7.79 44.5,8.5 19.015,8.59 21.115,8.99 19.015,9.79 21.115,10.29 44.5,10.5 19.015,11.09 21.115,11.386 22.059,12.29 19.015,12.39 44.5,12.5 17.575,13.89 44.5,14.5 18.815,15.1 17.915,15.696 18.815,15.983 -3,16 44.5,16.5 18.815,16.853 -3,18 12.99,18.015 44.5,18.5 -3,20 22.46,20.015 23.41,20.04 24.36,20.04 44.5,20.5 15.885,21.565 -3,22 44.5,22.5 16.31,23.04 -3,24 44.5,24.5 -3,26 44.5,26.5 -3,28 44.5,28.5 -3,30 44.5,30.5 -3,32 44.5,32.5 -3,34 44.5,34.5 -3,36 44.5,36.5 -3,38 44.5,38.5 23.3,38.9 25.8,38.9 32.8,38.9 39.6,38.915 42.225,38.915 -3,40 12.745,40.265 44.5,40.5 12.745,41.215 12.755,42.165 40.68,42.765 35.3,44 23.34,44.014 12.745,44.64
LOCK: P6.1
NC: P1.1
NetC3_1: C3.1 U3.6 | length 3.5
  L04-Bottom Layer w0.2: U3.6 18.43,18.49 ccw(c18.43,18.74) 18.68,18.74
  L04-Bottom Layer w0.3: C3.1 18.22,19.96 ccw(c18.44,19.96) 18.44,19.74 cw(c18.44,19.5) 18.68,19.5 18.68,18.74
NetC4_2: C4.2 R2.2 R4.1 U3.3 | length 3.9
  L04-Bottom Layer w0.2: C4.2 R2.2 R4.1 15.365,18.015 ccw(c15.365,18.215) 15.565,18.215 cw(c15.84,18.215) 15.84,18.49 U3.3
NetC9_1: C9.1 R5.2 | length 1.1
  L04-Bottom Layer w0.2: R5.2 C9.1
NetR5_1: R5.1 R6.1 U3.4 | length 2.7
  L04-Bottom Layer w0.2: R6.1 R5.1 16.955,19.43 16.465,18.94 U3.4
RF_OUTPUT: P3.1 U1.12 U2.9 | length 8.6
  L04-Bottom Layer w0.185: U1.12 39.896,35.086 ccw(c38.1,36.882) 40.64,36.882 P3.1
RX: P8.1 U1.6 U2.4 | length 38.7
  L02-Inner Layer w0.2: U1.6 9.721,12.531 ccw(c7.925,14.327) 10.465,14.327 10.465,35.773 ccw(c7.651,35.774) 9.64,37.765 ; P8.1@8.174,43.35 8.174,40.283 ccw(c10.714,40.283) 8.918,38.487 9.64,37.765
SW: C3.2 L1.1 U3.7 U3.9 | length 8.1
  L04-Bottom Layer w0.35: U3.9@17.165,16.09 U3.9 17.165,17.835 17.37,18.04 U3.7 20.365,18.04 21.115,17.29 L1.1@21.115,16.79
  L04-Bottom Layer w0.4: C3.2 19.14,20.265 ccw(c19.515,20.265) 19.515,19.89
TX: P7.1 U1.5 U2.3 | length 33.9
  L02-Inner Layer w0.2: U1.5 8.656,16.546 ccw(c6.86,18.342) 9.4,18.342 9.4,35.6 ccw(c7.227,35.6) 8.764,37.136 7.844,38.056 cw(c9.64,39.852) 7.1,39.852 7.1,40.8 ccw(c5.758,40.8) 6.707,41.749 P7.1
pads on no net: Designator1.1 Designator2.1 Designator3.1 Designator5.1 Designator6.1 Designator7.1 J1.MT1 J2.MT1 J3.Hole J3.MT J4.Hole J4.MT J5.Hole J5.MT J6.Hole J6.MT U1.1 U1.4 U2.1 U2.2 U3.5

## Polygon pours and split planes (outlines as drawn)
GND on L03-Inner Layer "GND_L03_P000" (solid, pour order 0): -5.06,-2.06 -5.06,42.74 cw(c-2.06,42.74) -2.06,45.74 -2.16,45.74 42.74,45.74 cw(c42.74,42.74) 45.74,42.74 45.74,-2.06 cw(c42.74,-2.06) 42.74,-5.06 -2.06,-5.06 cw(c-2.06,-2.06)
GND on L02-Inner Layer "GND_L02_P002" (solid, remove dead copper, pour order 2): -5.06,-2.06 -5.06,42.74 cw(c-2.06,42.74) -2.06,45.74 -2.16,45.74 42.74,45.74 cw(c42.74,42.74) 45.74,42.74 45.74,-2.06 cw(c42.74,-2.06) 42.74,-5.06 -2.06,-5.06 cw(c-2.06,-2.06)
+3.3V on L04-Bottom Layer "+3.3V_L04_P018" (solid, pour order 18): 34.715,3.99 cw(c34.075,3.775) 34.075,3.1 24.64,3.1 cw(c24.64,4.175) 23.565,4.175 23.565,13.043 cw(c23.875,13.043) 23.875,13.353 24.517,13.353 ccw(c24.517,13.75) 24.915,13.75 24.915,23.11 ccw(c24,23.11) 24,24.025 15.55,24.025 ccw(c15.55,23.55) 15.075,23.55 15.075,20.645 14.4,20.645 ccw(c14.4,20.435) 14.19,20.435 14.19,18.855 12.82,18.855 cw(c12.82,19) 12.675,19 12.675,19.9 cw(c12.99,19.9) 12.99,20.215 13.16,20.215 ccw(c13.16,20.675) 13.62,20.675 13.62,23.545 cw(c14.625,23.545) 14.625,24.55 32.175,24.55 cw(c32.175,22.01) 34.715,22.01
+5V on L04-Bottom Layer "+5V_L04_P017" (solid, pour order 17): -3.675,12.835 cw(c-1.135,12.835) -1.135,15.375 15.334,15.375 ccw(c15.334,15.696) 15.655,15.696 15.655,17.355 cw(c16.015,17.355) 16.015,17.715 16.815,17.715 16.815,15.43 ccw(c16.955,15.43) 16.955,15.29 16.955,14.03 cw(c16.815,14.03) 16.815,13.89 ccw(c16.815,13.64) 16.565,13.64 16.565,-2.11 cw(c15.4,-2.11) 15.4,-3.275 -2.425,-3.275 cw(c-2.425,-2.025) -3.675,-2.025
GND on L04-Bottom Layer "GND_L04_P019" (solid, remove dead copper, pour order 19): -5.06,-2.06 -5.06,42.74 cw(c-2.06,42.74) -2.06,45.74 -2.16,45.74 42.74,45.74 cw(c42.74,42.74) 45.74,42.74 45.74,-2.06 cw(c42.74,-2.06) 42.74,-5.06 -2.06,-5.06 cw(c-2.06,-2.06)
+3.3V_OSC on L04-Bottom Layer "+3.3V_OSC_L04_P016" (solid, pour order 16): 34.74,11.115 cw(c35.165,11.115) 35.165,11.54 37.765,11.54 cw(c37.765,11.155) 38.15,11.155 38.15,9.53 ccw(c38.59,9.53) 38.59,9.09 39.09,9.09 cw(c39.09,8.84) 39.34,8.84 39.34,8.415 ccw(c39.815,8.415) 39.815,7.94 42.04,7.94 cw(c42.04,7.415) 42.565,7.415 42.565,3.89 cw(c41.79,3.89) 41.79,3.115 35.59,3.115 cw(c35.59,3.965) 34.74,3.965
SW on L04-Bottom Layer "SW_L04_P009" (solid, pour order 9): 18.115,17.89 18.544,17.89 19.315,17.119 19.315,14.356 19.781,13.89 21.915,13.89 21.915,20.19 19.215,20.19 19.04,20.015 19.04,18.64 18.59,18.19 18.115,18.19
GND on L01-Top Layer "GND_L01_P020" (solid, pour order 20): -5.06,-2.06 -5.06,42.74 cw(c-2.06,42.74) -2.06,45.74 -2.16,45.74 42.74,45.74 cw(c42.74,42.74) 45.74,42.74 45.74,-2.06 cw(c42.74,-2.06) 42.74,-5.06 -2.06,-5.06 cw(c-2.06,-2.06)

## Keep-outs
L04-Bottom Layer:
  region: -2.36,24.315 -2.36,16.44 2.965,16.44 2.965,24.315

## Other copper
L04-Bottom Layer:
  pour cut-out: 17.515,16.99 17.515,17.715 17.915,17.715 17.915,17.89 17.315,17.89 17.315,16.99
  pour cut-out: 17.265,21.46 17.265,21.175 17.92,21.175 17.92,21.485
  pour cut-out: 21.915,19.69 24.915,19.69 24.915,13.89 21.915,13.89

## Silkscreen, mask and mechanical layers (free items; w line width, h text height)
Top Overlay:
Top Solder:
  region: 244 vertices and 0 holes, not listed, extent 33.769,41.345 34.536,42.112
M01_PCB_Outline:
  lines w0.254: -2.16,45.74 42.74,45.74 cw(c42.74,42.74) 45.74,42.74 45.74,-2.06 cw(c42.74,-2.06) 42.74,-5.06 -2.06,-5.06 cw(c-2.06,-2.06) -5.06,-2.06 -5.06,42.74 cw(c-2.06,42.74) -2.06,45.74
Taitien_footprint_baseline:
  drawing of 157 lines, arcs and shapes, not listed
  text "Pin 10" at 14.781,41.705 h2 r315
  text "Pin 8" at 8.406,41.33 h2 r315
  text "Pin 6" at 2.431,41.28 h2 r315
  text "Pin 9" at 11.581,41.28 h2 r315
  text "Pin 7" at 5.341,41.114 h2 r315
  text "Taitien DTA-100 Опциональные ПИНЫ" at 52.875,39.944 h3
  text "Pin 4" at 0.716,38.939 h2 r315
  text "Pin 3" at 39.141,37.812 h2
  text "Pin 2" at 39.291,22.14 h2
  text "Pin 1" at 39.091,1.84 h2
  text "Pin 5" at -1.759,1.712 h2